# Allegro board pem.brd
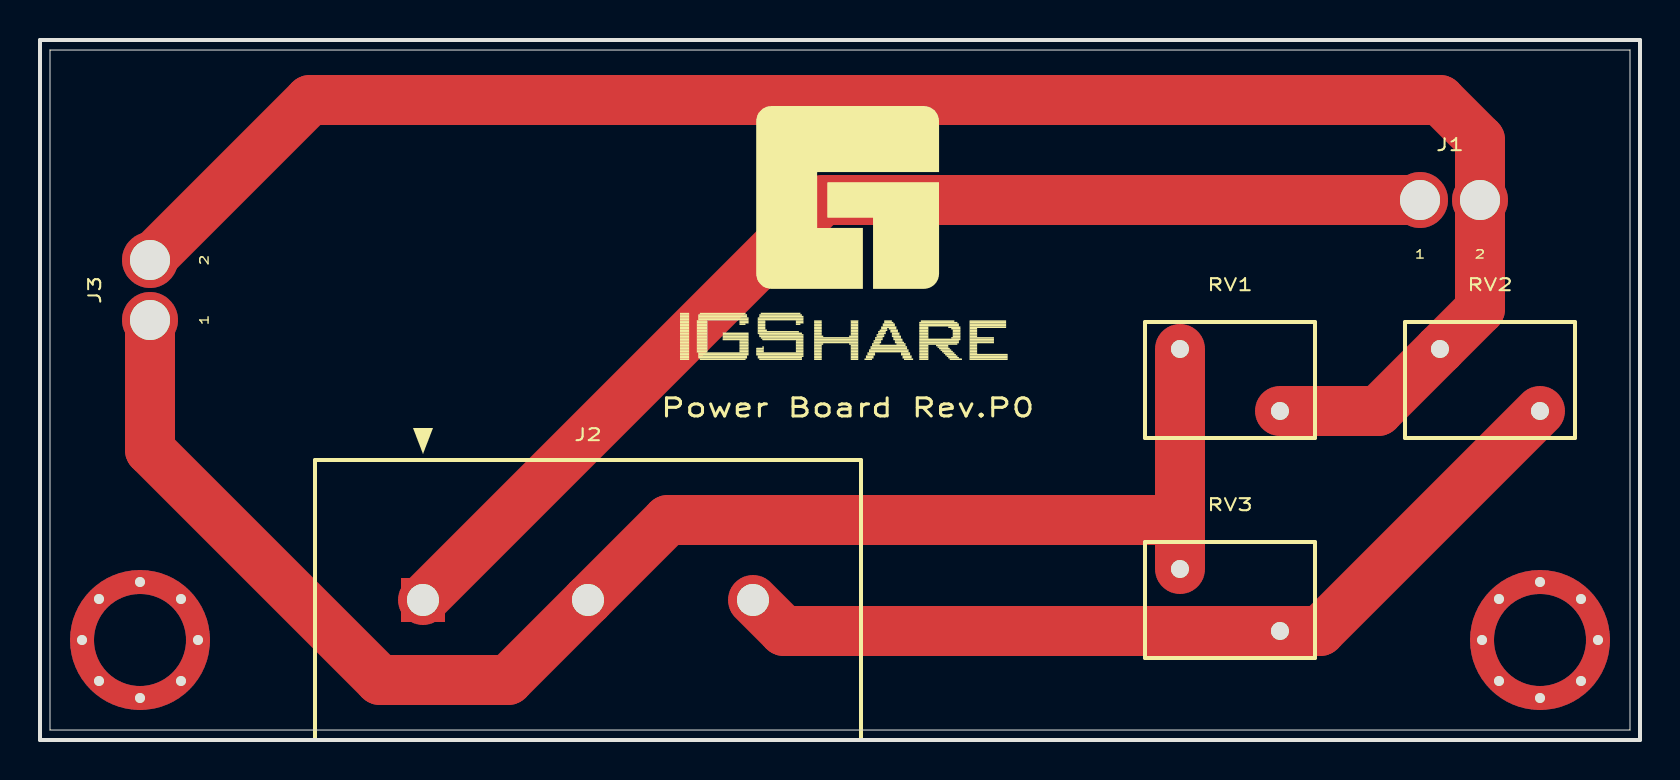
[diagram p0: board, top side]
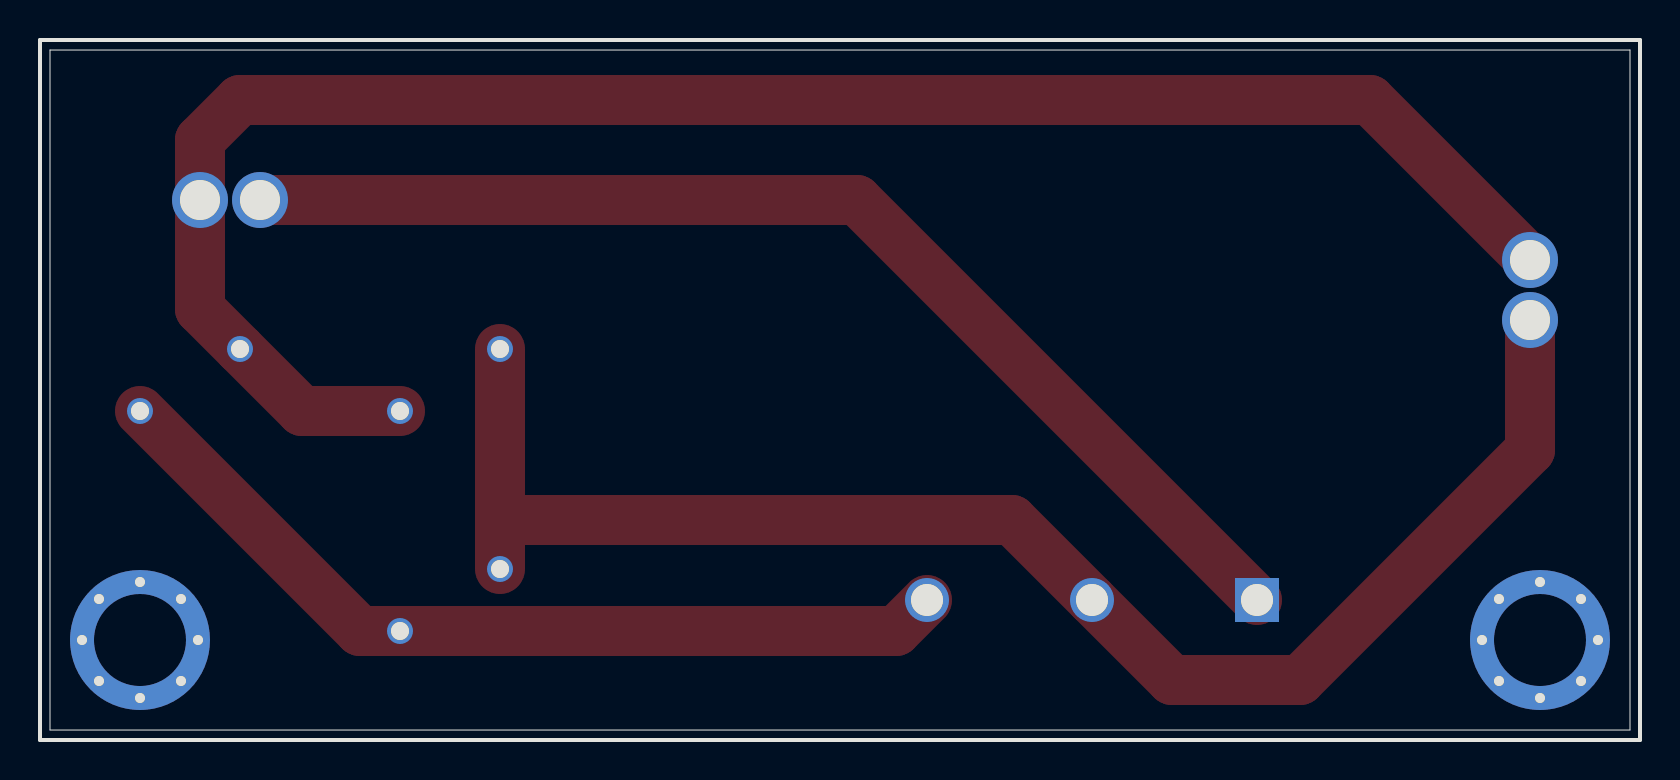
[diagram p1: board, bottom side, seen from below]

Outline 80 x 35 mm; copper layers: TOP, BOTTOM. Coordinates in mm from the lower left corner of the outline.
Outline path: 0,35 0,0 80,0 80,35 0,35 ; 0.5,34.5 79.5,34.5 79.5,0.5 0.5,0.5 0.5,34.5

## Placement (name value [footprint] x y rotation side)
J1  -  [CON2]  70.5 27 0 top
J2  -  [OSTYK41203030]  27.4 7 0 top
J3  -  [CON2]  5.5 22.5 90 top
MH1  -  [MHOLE3_5]  75 5 0 top
MH2  -  [MHOLE3_5]  5 5 0 top
NOREF  -  []  32 19 0 top
RV1  -  [ERZ-V07D471]  59.5 18 0 top
RV2  -  [ERZ-V07D471]  72.5 18 0 top
RV3  -  [ERZ-V07D471]  59.5 7 0 top

## Library data of the parts
J1 J3 = CON2: alternate symbols: (B:CON2_ALT)
J2 = OSTYK41203030: alternate symbols: (B:OSTYK41203030_ALT)
MH1 MH2 = HOLE_MOUNT: alternate symbols: (B:MHOLE3_5_ALT)
RV1-RV3 = ERZ-V07D471: alternate symbols: (B:ERZ-V07D471_ALT)

## Footprints (pads in the part's own frame, mm; a bottom-side part is the same pattern mirrored in y, then rotated)
CON2
  round 2.8 hole 2: 1(-1.5,0) 2(1.5,0)
ERZ-V07D471
  round 1.3 hole 0.9: 1(-2.5,1.55) 2(2.5,-1.55)
MHOLE3_5
  round 0.9 hole 0.5: 1(2.9,0) 2(2.051,2.051) 3(0,2.9) 4(-2.051,2.051) 5(-2.9,0) 6(-2.051,-2.051) 7(0,-2.9) 8(2.051,-2.051)
OSTYK41203030
  rect 2.2x2.2 hole 1.6: 1(-8.25,0)
  round 2.2 hole 1.6: 2(0,0) 3(8.25,0)

## Nets
GND: J2.3 RV2.2 RV3.2
FUSE: J1.1 J2.1
N: J2.2 J3.1 RV1.1 RV3.1
P: J1.2 J3.2 RV1.2 RV2.1

Pads without a net: MH1 1 2 3 4 5 6 7 8; MH2 1 2 3 4 5 6 7 8

## Routing (per net, layer and track width the routed paths; a pad name or vN(x,y) marks a point on that pad's centre or on a via; arc(x,y) is an arc through that point)
GND: length 44.5
  TOP w2.5: J2.3 37.2,5.45 RV3.2 64,5.45 RV2.2
FUSE: length 58.1
  TOP w2.5: J2.1 39.15,27 J1.1
N: length 77.1
  TOP w2.5: RV3.1 57,11 ; 57,11 31.4,11 J2.2 23.4,3 17,3 5.5,14.5 J3.1 ; 57,11 RV1.1
P: length 91.2
  TOP w2.5: J3.2 13.5,32 70,32 72,30 J1.2 72,21.55 RV2.1 66.9,16.45 RV1.2

## Text on the board
DRAWING_TOP: LAYER_1 | LAYER_2 | SILK_1 | MASK_1 | COMP_SIDE | SOLD_SIDE | MASK_2 | SILK_2 | 2LAYER STACKUP | Layers | T | OZ | PCB Layer | PCB Thickness | Copper Thickness | Material Type | 02 | 1.6 | X.X | FR-4 | PCB Specification
